# EAGLE board Moist_Detector_Vero (33x50) (EAGLE 7.7.0)
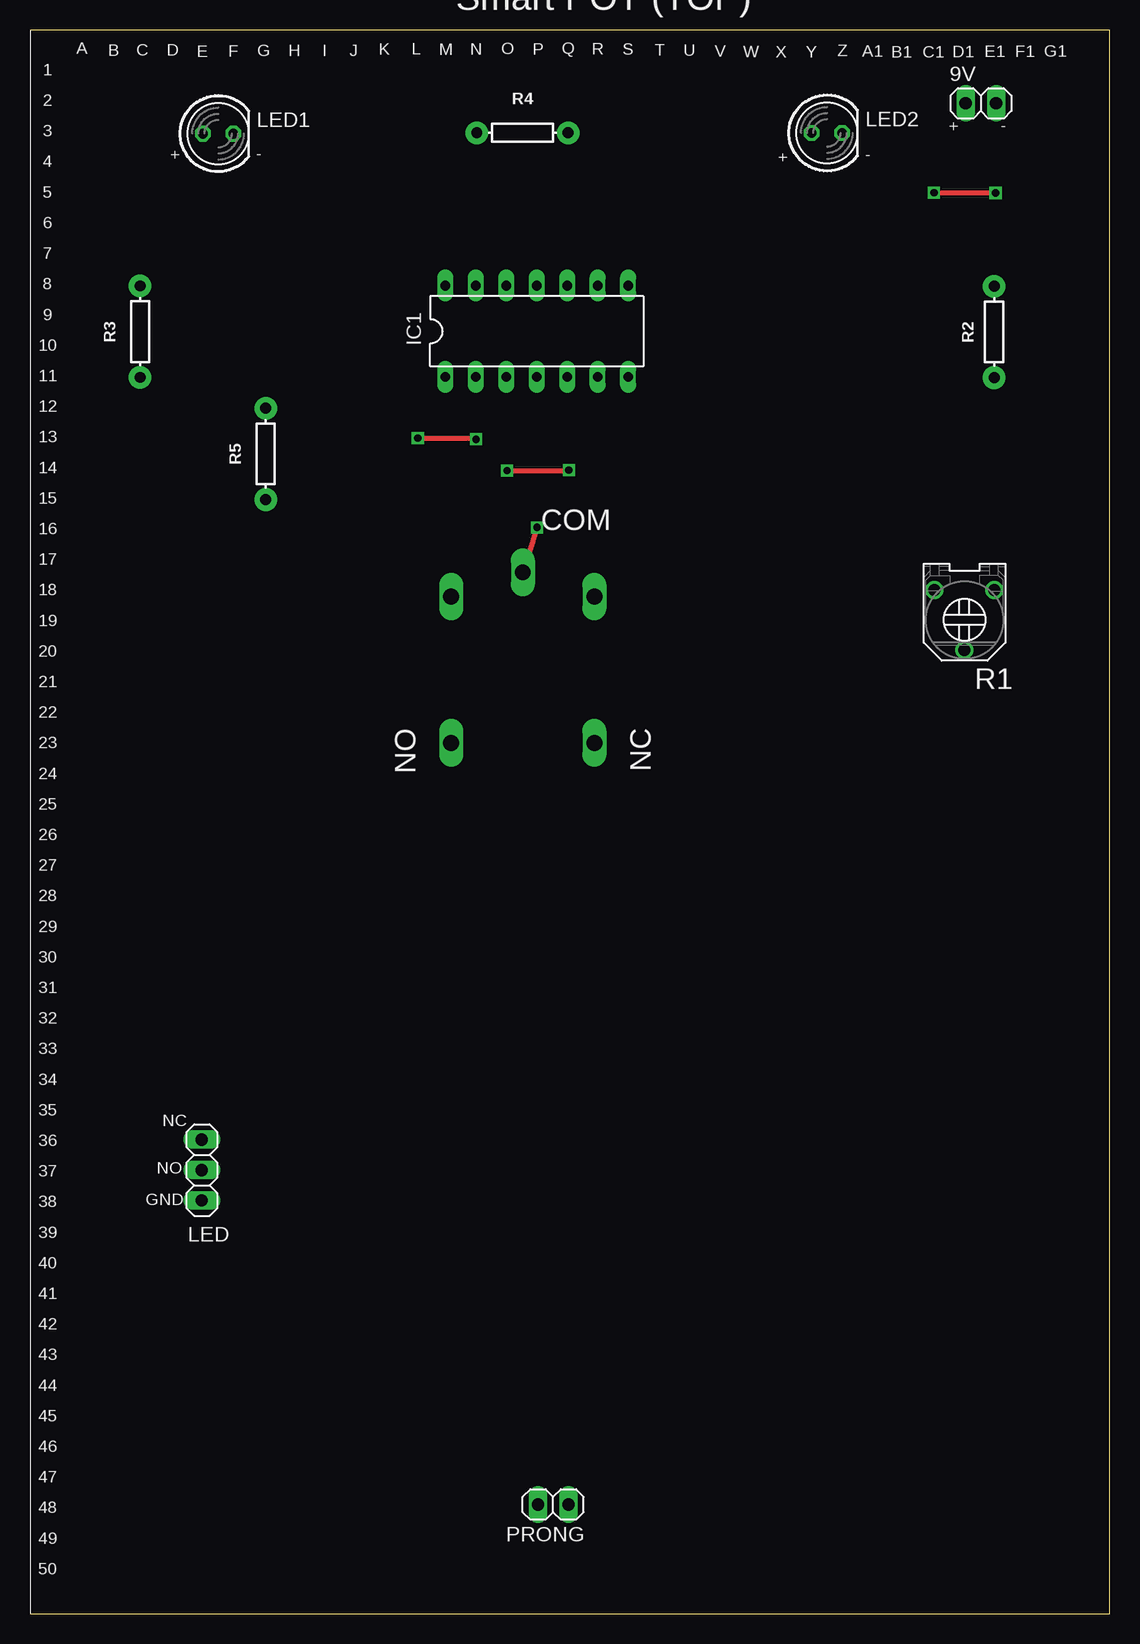
[diagram p0: board, top side]
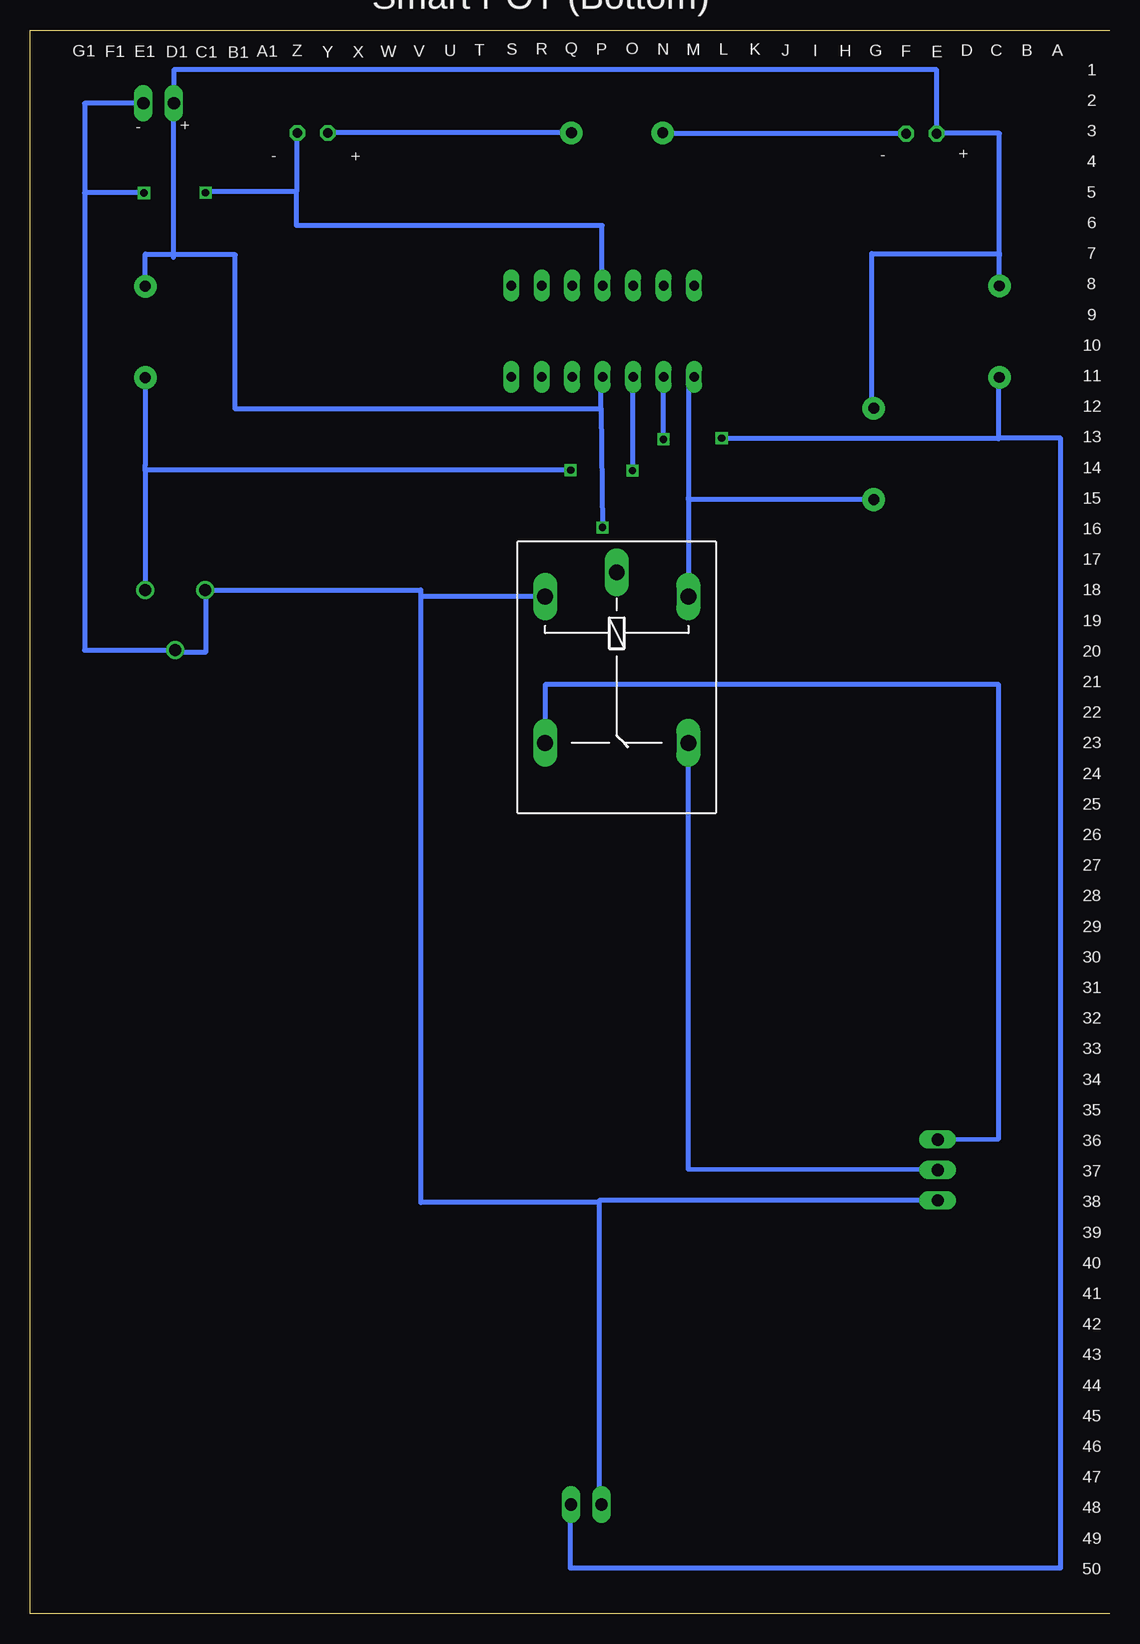
[diagram p1: board, bottom side, seen from below]

Size 90 x 132 mm. Coordinates in mm from the lower left corner, seen from the top.
Outline: 0,0 90,0 90,132 0,132
Copper layers (1*16): Top 0.035mm / dielectric 1.5mm / Bottom 0.035mm
Design rules "default": minimum track width 10mil, minimum drill 24mil, track to track 8mil, track to pad 8mil, pad to pad 8mil, via to via 8mil, smd to smd 8mil, copper to edge 40mil, drill to drill 8mil, minimum pad ring 10mil, minimum via ring 8mil, stop-mask expansion 4mil, vias tented up to drill 0mil, thermal gap 10mil

## Footprints (pad centres in the part's own frame; a part is rotated, then mirrored left to right if it is on the bottom)
1X02 = drill 1.016 long: 1 -1.27,0; 2 1.27,0
G5LE = drill 1.321 long: 1 -7.493,-5.969; 2 -7.493,5.969; O 4.699,5.969; P -9.525,0; S 4.699,-5.969
DIL14 = drill 0.813 long: 1 -7.62,-3.81; 2 -5.08,-3.81; 3 -2.54,-3.81; 4 0,-3.81; 5 2.54,-3.81; 6 5.08,-3.81; 7 7.62,-3.81; 8 7.62,3.81; 9 5.08,3.81; 10 2.54,3.81; 11 0,3.81; 12 -2.54,3.81; 13 -5.08,3.81; 14 -7.62,3.81
1X03 = drill 1.016 long: 1 -2.54,0; 2 0,0; 3 2.54,0
LED-5MM = drill 0.813 octagon: A -1.27,0; K 1.27,0
TRIMMER_3306F = drill 1: 1 -2.5,-2.5; 2 0,2.5; 3 2.5,-2.5
AXIAL-0.3 = drill 0.9 pad 1.88: P$1 -3.81,0; P$2 3.81,0

## Placement (x,y rotation side)
9V  [1X02]  79.28,125.89 0 top
A  5v Relay  [G5LE]  41.09,77.27 270 bottom
IC1  LM324N  [DIL14]  42.25,106.88 0 top
LED  [1X03]  14.32,36.97 90 top
LED1  [LED-5MM]  15.69,123.36 0 top
LED2  [LED-5MM]  66.44,123.42 0 top
PRONG  [1X02]  43.62,9.09 180 top
R1  100k  [TRIMMER_3306F]  77.91,82.82 180 top
R2  10k  [AXIAL-0.3]  80.39,106.83 90 top
R3  2.2k  [AXIAL-0.3]  9.18,106.86 90 top
R4  470  [AXIAL-0.3]  41.05,123.43 0 top
R5  1k  [AXIAL-0.3]  19.65,96.67 90 top
U$1  [1X50]  4.25,66.23 90 top
U$2  [1X50]  6.79,66.23 90 top
U$3  [1X50]  9.33,66.23 90 top
U$4  [1X50]  11.87,66.23 90 top
U$5  [1X50]  14.41,66.23 90 top
U$6  [1X50]  16.95,66.23 90 top
U$7  [1X50]  19.49,66.23 90 top
U$8  [1X50]  22.03,66.23 90 top
U$9  [1X50]  24.57,66.23 90 top
U$10  [1X50]  27.11,66.23 90 top
U$11  [1X50]  29.65,66.23 90 top
U$12  [1X50]  32.19,66.23 90 top
U$13  [1X50]  34.73,66.23 90 top
U$14  [1X50]  37.27,66.23 90 top
U$15  [1X50]  39.81,66.23 90 top
U$16  [1X50]  42.35,66.23 90 top
U$17  [1X50]  44.89,66.23 90 top
U$18  [1X50]  47.43,66.23 90 top
U$19  [1X50]  49.97,66.23 90 top
U$20  [1X50]  52.51,66.23 90 top
U$21  [1X50]  55.05,66.23 90 top
U$22  [1X50]  57.59,66.23 90 top
U$23  [1X50]  60.13,66.23 90 top
U$24  [1X50]  62.67,66.23 90 top
U$25  [1X50]  65.21,66.23 90 top
U$26  [1X50]  67.75,66.23 90 top
U$27  [1X50]  70.29,66.23 90 top
U$28  [1X50]  72.83,66.23 90 top
U$29  [1X50]  75.37,66.23 90 top
U$30  [1X50]  77.91,66.23 90 top
U$31  [1X50]  80.45,66.23 90 top
U$32  [1X50]  82.99,66.23 90 top
U$33  [1X50]  85.53,66.23 90 top

## Library data of the parts
9V LED PRONG = pinhead
A = relay; OC_FARNELL: unknown; OC_NEWARK: unknown
IC1 = linear
LED1 LED2 R1 = dp_devices
R2 = SparkFun-Resistors; PROD_ID: RES-09435
R3-R5 = SparkFun-Resistors; PROD_ID: RES-08380
U$1-U$33 = pinhead_1x14_no_frame MOD

## Nets
GND: 9V.2 A.1 IC1.11 LED2.K LED.1 PRONG.2 R1.2 R1.3
N$1: A.O LED.2
N$2: IC1.3 R1.1 R2.P$1
N$3: A.S LED.3
N$4: IC1.2 PRONG.1 R3.P$1
N$6: LED1.K R4.P$1
N$7: LED2.A R4.P$2
S$1: A.2 IC1.1 R5.P$1
VCC: 9V.1 A.P IC1.4 LED1.A R2.P$2 R3.P$2 R5.P$2

## Tracks (layer width: path | path; a pad name or v marks a point on that pad's centre or on a via)
GND  (via drill 0.6)
  Top 0.406: v75.37,118.45 80.5,118.45 v80.5,118.42
  Bottom 0.406: 9V.2 85.46,125.89 85.46,118.42 | 85.46,118.42 85.46,80.3 77.91,80.3 R1.2 77.91,80.1 75.36,80.1 75.36,85.32 R1.3 57.41,85.32 57.41,84.76 | IC1.11 42.3,110.69 42.3,115.7 67.79,115.7 67.79,118.51 | 42.52,34.26 57.41,34.26 57.41,84.76 | PRONG.2 42.52,9.09 42.52,34.11 42.52,34.26 | 67.79,118.51 75.37,118.51 v75.37,118.45 | v80.5,118.42 85.46,118.42 | LED2.K 67.79,123.42 67.79,118.51 | A.1 57.41,84.76 | LED.1 42.52,34.42 42.52,34.26
N$1
  Bottom 0.406: LED.2 35.12,37.04 A.O
N$2  (via drill 0.6)
  Top 0.406: v39.77,95.26 44.92,95.26 v44.92,95.31
  Bottom 0.406: R2.P$1 80.41,103.02 80.41,95.7 80.41,95.31 | 80.41,95.31 R1.1 | IC1.3 39.77,103.07 v39.77,95.26 | v44.92,95.31 80.41,95.31
N$3
  Bottom 0.406: LED.3 9.24,39.58 9.24,77.42 47.05,77.42 A.S
N$4  (via drill 0.6)
  Top 0.406: v32.33,97.97 37.18,97.97 v37.18,97.88
  Bottom 0.406: PRONG.1 44.97,9.09 44.97,3.8 4.08,3.8 4.08,97.97 9.26,97.97 | 9.18,103.01 R3.P$1 9.26,103.05 9.26,97.97 | v32.33,97.97 32.33,97.93 9.26,97.93 9.26,97.97 | v37.18,97.88 v37.17,97.88 IC1.2
N$6
  Bottom 0.406: LED1.K 37.24,123.36 R4.P$1
N$7
  Bottom 0.406: R4.P$2 LED2.A
S$1
  Bottom 0.406: IC1.1 35.12,103.07 35.12,92.98 35.12,92.86 | 35.12,92.86 A.2 | R5.P$1 35.12,92.86
VCC  (via drill 0.6)
  Top 0.406: v42.26,90.54 A.P
  Bottom 0.406: R2.P$2 80.39,110.6 80.38,110.6 80.38,113.33 78.06,113.33 | 78.06,113.33 78.06,125.89 9V.1 78.01,128.68 14.42,128.68 LED1.A 14.42,123.38 9.17,123.38 9.17,113.36 | 78.06,113.26 78.06,113.04 | R3.P$2 9.17,113.22 9.17,113.36 | IC1.4 42.43,103.07 42.43,100.42 | 42.43,100.42 72.89,100.42 72.89,113.26 78.06,113.26 | 42.43,100.42 42.39,100.42 v42.26,90.54 | 78.06,113.33 78.06,113.26 | R5.P$2 19.82,100.48 19.82,113.36 9.17,113.36

## Text on the board
tPlace: COM | NO | NC | NC | NO | GND
tNames: Smart POT (TOP) | A | Q | B | C | D | E | F | G | H | I | J | K | L | M | N | O | P | R | S | T | U | V | W | X | Y | Z | A1 | B1 | C1 | D1 | E1 | F1 | G1 | + | - | + | - | + | - | 1 / 2 / 3 / 4 / 5 / 6 / 7 / 8 / 9 / 10 / 11 / 12 / 13 / 14 / 15 / 16 / 17 / 18 / 19 / 20 / 21 / 22 / 23 / 24 / 25 / 26 / 27 / 28 / 29 / 30 / 31 / 32 / 33 / 34 / 35 / 36 / 37 / 38 / 39 / 40 / 41 / 42 / 43 / 44 / 45 / 46 / 47 / 48 / 49 / 50
bNames: Smart POT (Bottom) | Q | A | B | C | D | E | F | G | H | I | J | K | L | M | N | O | P | R | S | T | U | V | W | X | Y | Z | A1 | B1 | C1 | D1 | E1 | F1 | G1 | + | - | + | - | + | - | 1 / 2 / 3 / 4 / 5 / 6 / 7 / 8 / 9 / 10 / 11 / 12 / 13 / 14 / 15 / 16 / 17 / 18 / 19 / 20 / 21 / 22 / 23 / 24 / 25 / 26 / 27 / 28 / 29 / 30 / 31 / 32 / 33 / 34 / 35 / 36 / 37 / 38 / 39 / 40 / 41 / 42 / 43 / 44 / 45 / 46 / 47 / 48 / 49 / 50